# EAGLE board E-Book Reader (EAGLE 9.7.0)
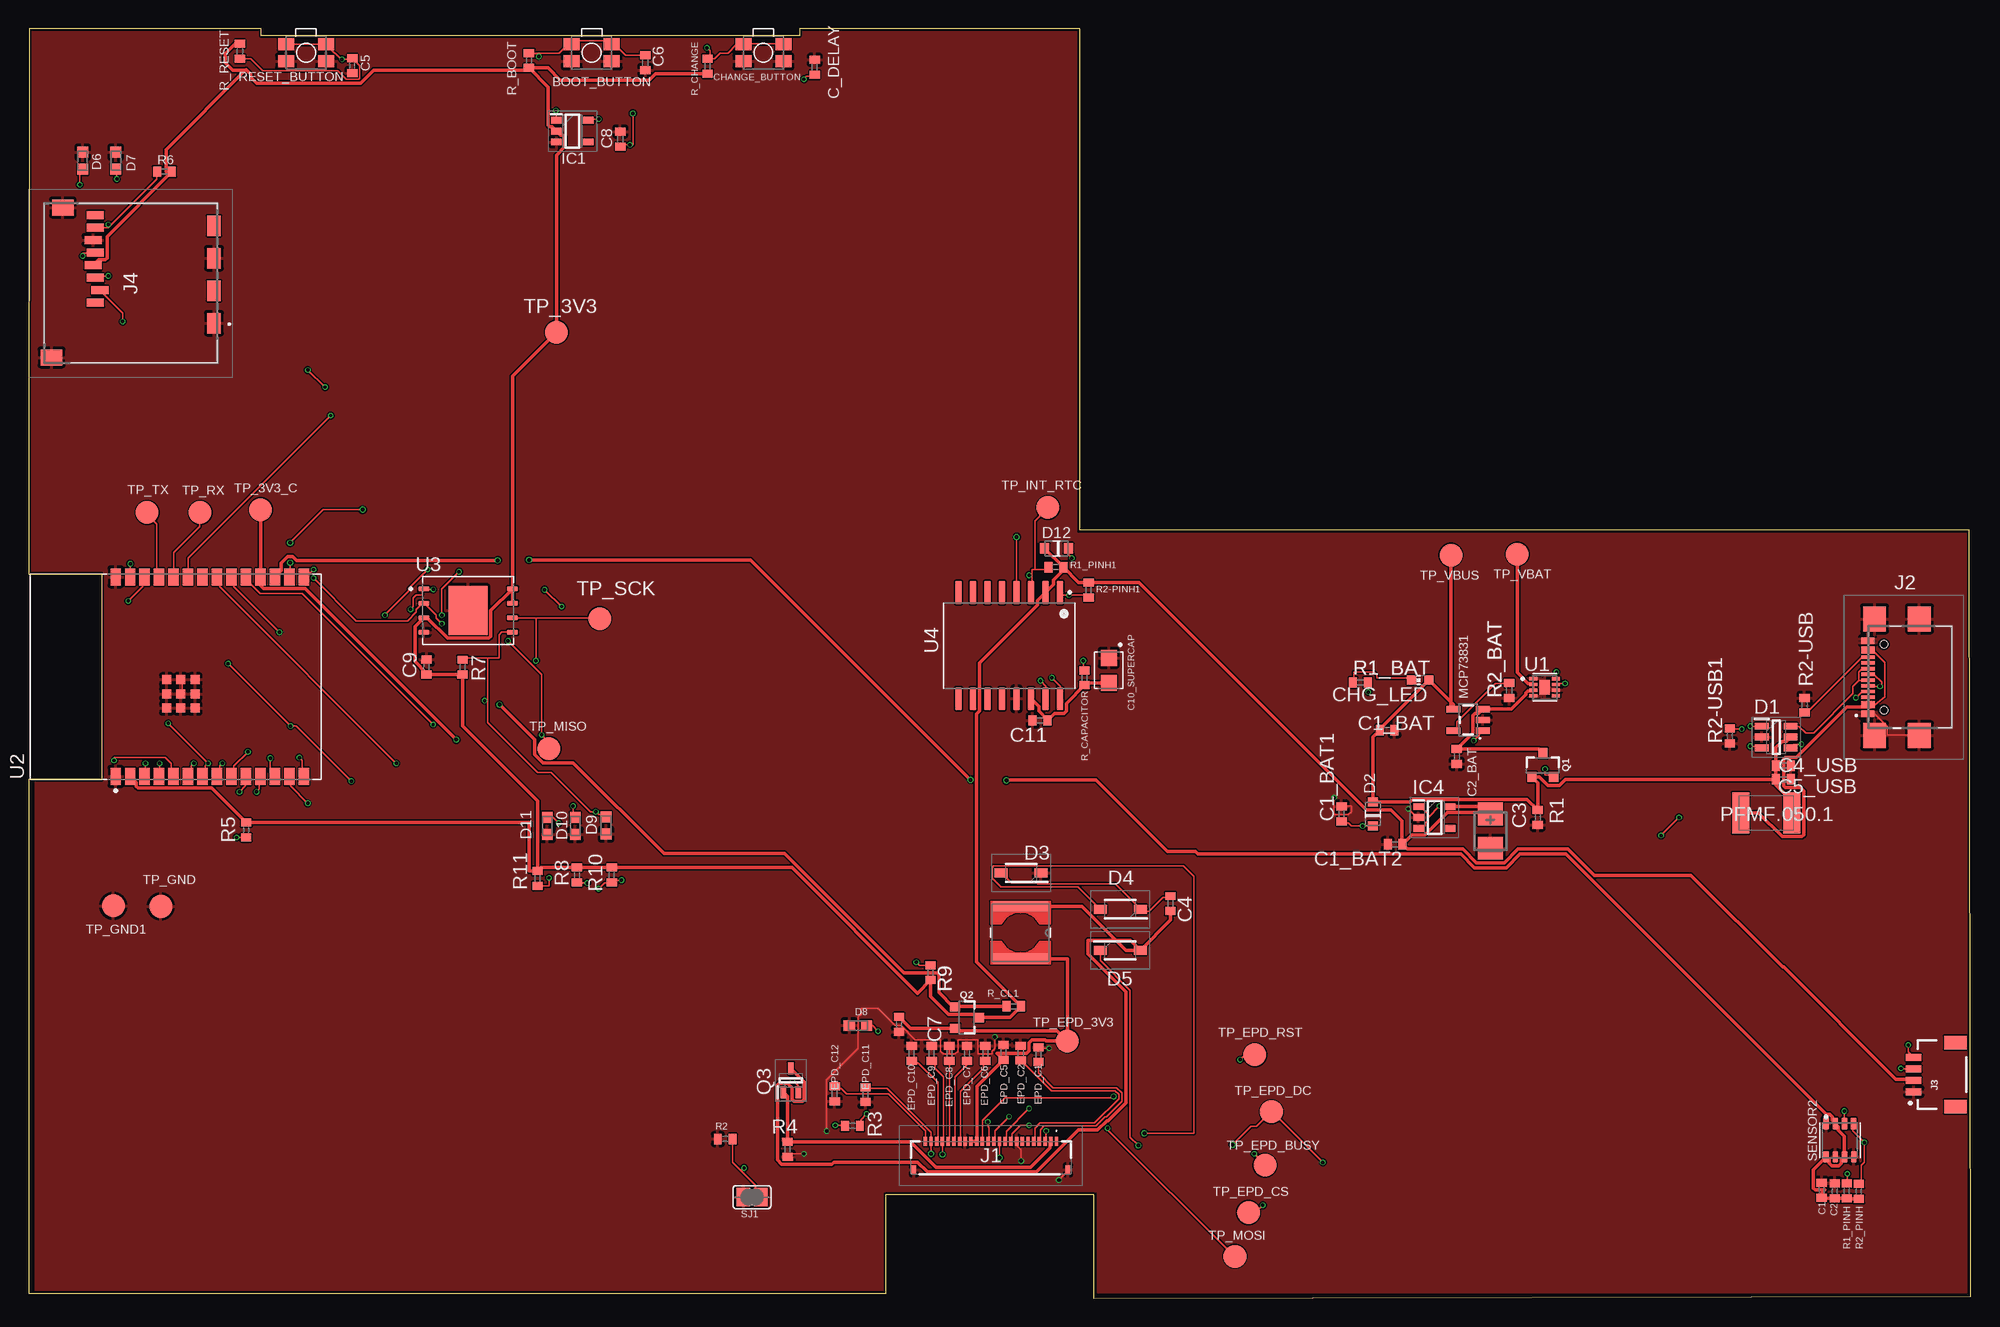
[diagram p0: board, top side]
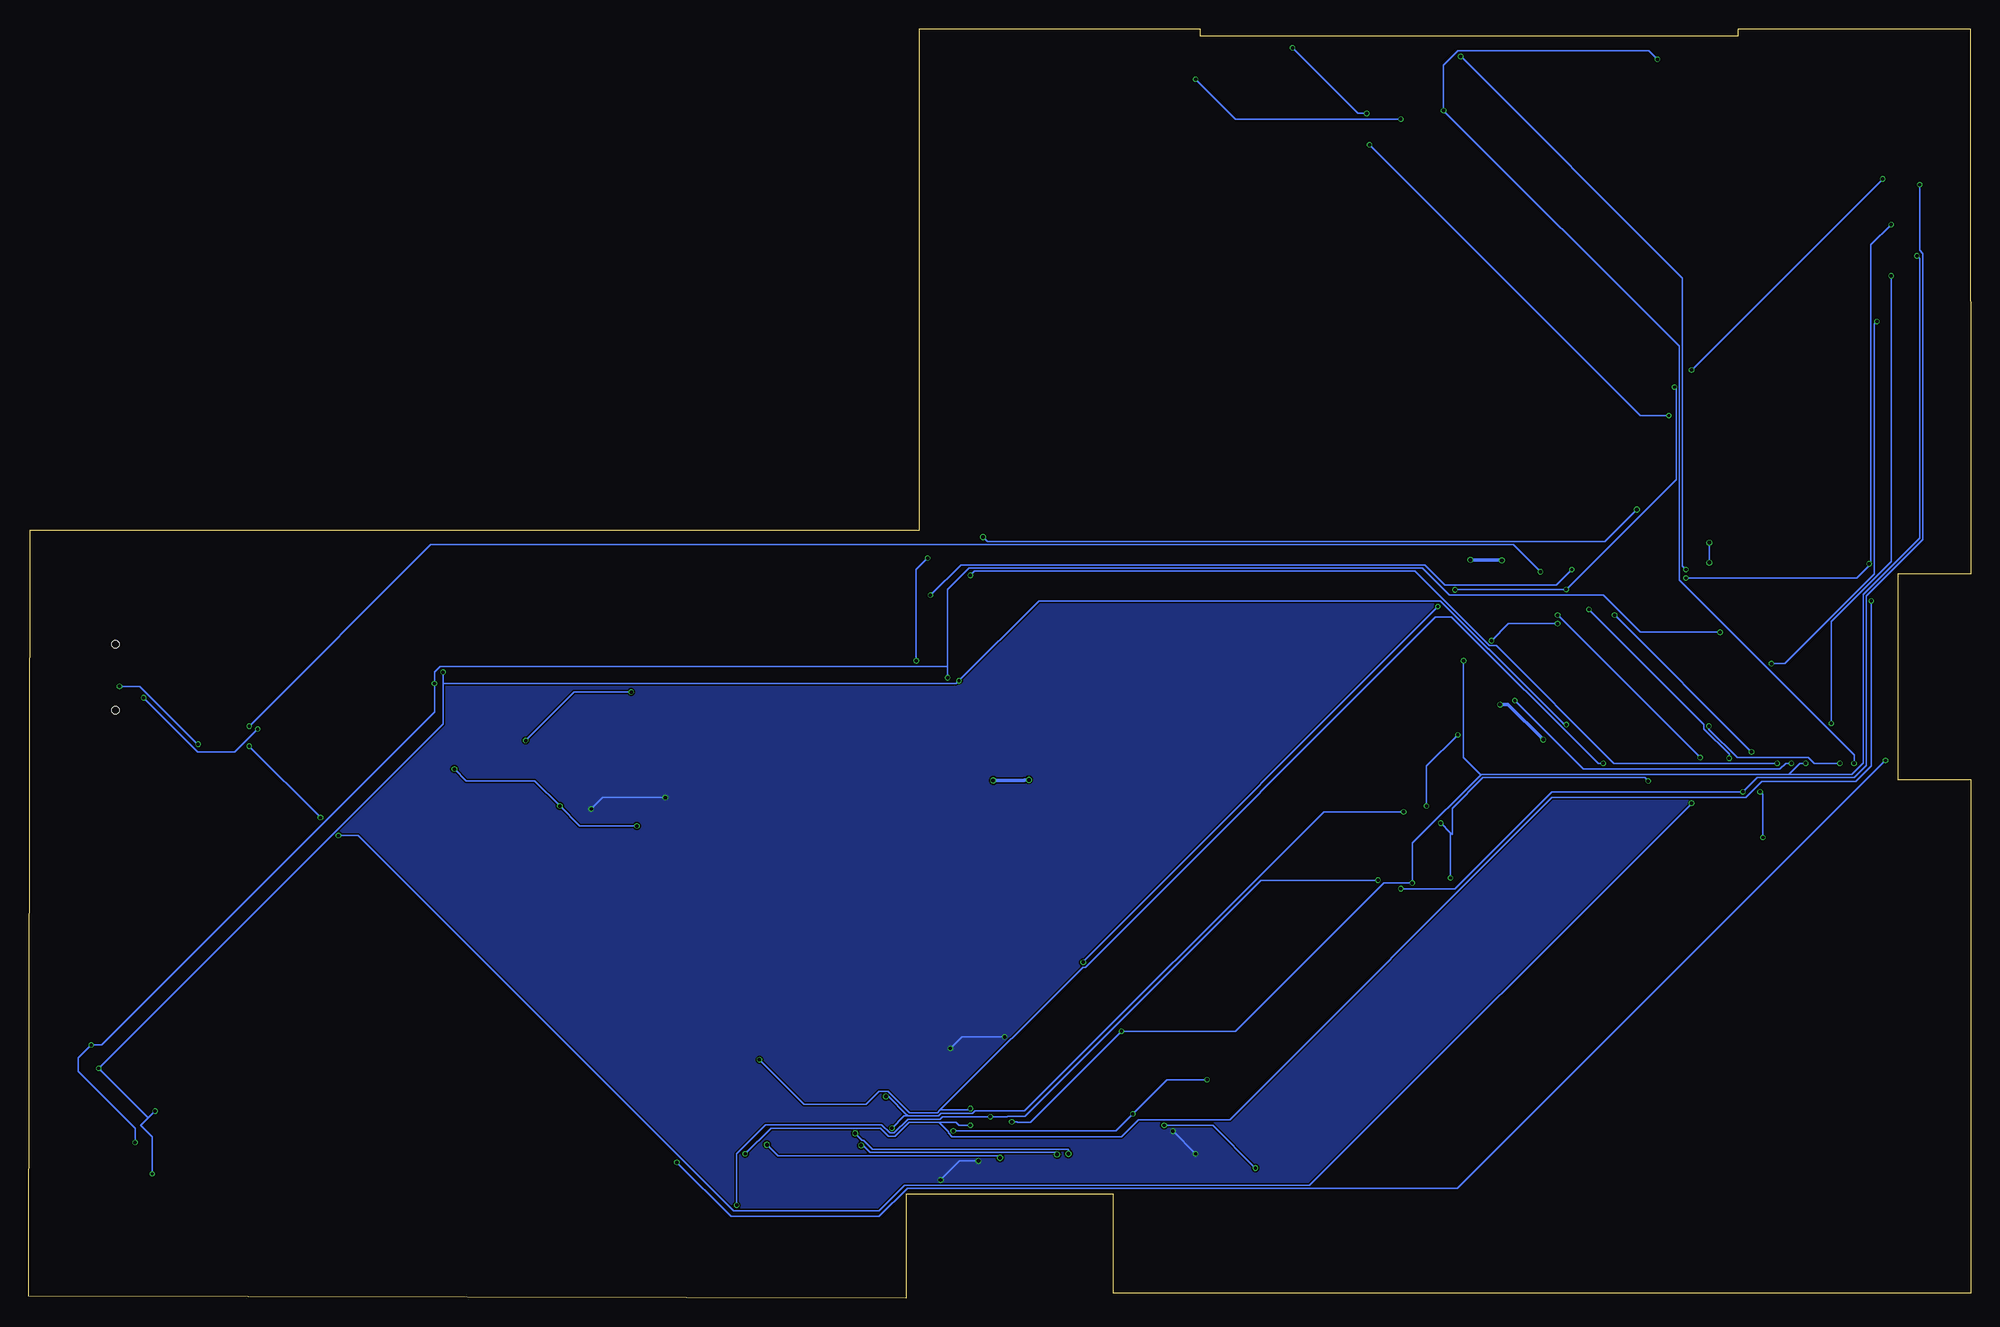
[diagram p1: board, bottom side, seen from below]

Size 170.35 x 111.35 mm. Coordinates in mm from the lower left corner, seen from the top.
Outline: 0,0.4 75.2,0.4 75.2,9.1 93.4,9.1 93.4,0 170.35,0.15 170.2,67.35 92.2,67.35 92.2,111.35 67.6,111.35 67.6,110.7 20.4,110.7 20.4,111.35 0.05,111.35 0.03,63.5 6.4,63.5 6.4,45.5 0.02,45.5 0,0.4
Copper layers (1*16): Top 0.035mm / dielectric 1.6mm / Bottom 0.035mm
Design rules "jlcpcb-2layers.dru *": minimum track width 6mil, minimum drill 0.3mm, track to track 5mil, track to pad 5mil, pad to pad 5mil, via to via 5mil, smd to smd 5mil, copper to edge 0.2mm, drill to drill 6mil, minimum pad ring 10mil, minimum via ring 3mil, stop-mask expansion 4mil, vias tented up to drill 0mil, thermal gap 10mil

## Footprints (pad centres in the part's own frame; a part is rotated, then mirrored left to right if it is on the bottom)
MYBUTTON = smd 1.4 x 1.05: 1 1.75,0.75; 2 -1.75,0.75; 3 -1.75,-0.75; 4 1.75,-0.75
ESP32_WROVER_EAGLE-LTSPICE_C0402 = smd 0.7 x 0.9: 1 -0.65,0; 2 0.65,0
RCL_CT3528 = smd 2 x 2.2: + -1.5,0; - 1.5,0
CAPCP3225X100N = smd 1.4 x 1.4: 1 -1.1,0; 2 1.1,0
ADAFRUIT_CHIP-LED0603 = smd 0.8 x 0.8: A 0,-0.75; C 0,0.75
SOT95P280X145-6N = smd 1.2 x 0.6: 1 -1.25,0.95; 2 -1.25,0; 3 -1.25,-0.95; 4 1.25,-0.95; 5 1.25,0; 6 1.25,0.95
ESP32_WROVER_AVX---SD0805S020S1R0_AVX_SD0805S020S1R0_0 = smd 0.8 x 0.9: 1 -1.05,0; 2 1.05,0
SOD3716X135N = smd 1.15 x 0.8: 1 -1.75,0; 2 1.75,0
DIOC1608X36N = smd 0.97 x 0.94: 1 -0.75,0; 2 0.75,0
SOT95P280X125-5N = smd 0.9 x 0.6: 1 -1.4,0.95; 2 -1.4,0; 3 -1.4,-0.95; 4 1.4,-0.95; 5 1.4,0.95
SOT95P280X120-5N = smd 0.9 x 0.6: 1 -1.4,0.95; 2 -1.4,0; 3 -1.4,-0.95; 4 1.4,-0.95; 5 1.4,0.95
FH34SRJ24S05SH99 = smd 0.3 x 0.8: 1 5.75,1.45; 2 5.25,1.45; 3 4.75,1.45; 4 4.25,1.45; 5 3.75,1.45; 6 3.25,1.45; 7 2.75,1.45; 8 2.25,1.45; 9 1.75,1.45; 10 1.25,1.45; 11 0.75,1.45; 12 0.25,1.45; 13 -0.25,1.45; 14 -0.75,1.45; 15 -1.25,1.45; 16 -1.75,1.45; 17 -2.25,1.45; 18 -2.75,1.45; 19 -3.25,1.45; 20 -3.75,1.45; 21 -4.25,1.45; 22 -4.75,1.45; 23 -5.25,1.45; 24 -5.75,1.45 | smd 0.4 x 0.8: MP1 6.75,-1.05; MP2 -6.75,-1.05
SAMACSYS_PARTS_USB4110GFA = smd 0.3 x 1.15: A1 -3.35,4.017; A4 -2.55,3.989; A5 -1.25,3.989; A6 -0.25,3.989; A7 0.25,3.989; A8 1.25,3.989; A9 2.55,3.989; A12 3.348,4.02; B1 3.048,4.02; B4 2.25,3.989; B5 1.75,3.989; B6 0.75,3.989; B7 -0.75,3.989; B8 -1.75,3.989; B9 -2.25,3.989; B12 -3.05,4.017 | smd 2.18 x 2: MP1 -5.11,-0.516; MP2 5.11,-0.516; MP3 -5.11,3.414; MP4 5.11,3.414 | hole 0.65: -2.89,2.603; 2.89,2.603
JST04_1MM_RA = smd 0.6 x 1.35: 1 -1.5,0; 2 -0.5,0; 3 0.5,0; 4 1.5,0 | smd 1.2 x 2: NC1 2.8,-3.675; NC2 -2.8,-3.675
112ATAARR03ATTEND = smd 1.8 x 1.2: G1 10.6,10.4; G2 4.9,10.4; S1 7.75,10.4; S2 2.05,10.4 | smd 1.4 x 1.9: G3 13.6,-3.85; G4 0.45,-2.85 | smd 0.7 x 1.5: P1 8.8,0; P2 7.7,0.4; P3 6.6,0; P4 5.5,-0.2; P5 4.4,0; P6 3.3,-0.2; P7 2.2,0; P8 1.1,0
IND_4828-WE-TPC_WRE = smd 0.889 x 4.826: 1 -2.286,0; 2 2.286,0
ESP32_WROVER_SPARKFUN-IC-POWER_SOT23-5 = smd 0.55 x 1.2: 1 -0.95,-1.3; 2 0,-1.3; 3 0.95,-1.3; 4 0.95,1.3; 5 -0.95,1.3
ESP32C6_VARISTOR_CT/CN1812 = smd 1.5 x 3.6: 1 -2.25,0; 2 2.25,0
ESP32_WROVER_SPARKFUN-DISCRETESEMI_SOT23-3 = smd 0.8 x 0.9: 1 -0.95,-1; 2 0.95,-1; 3 0,1.1
SOT65P210X110-3N = smd 1.05 x 0.5: 1 -1.05,0.65; 2 -1.05,-0.65; 3 1.05,0
ESP32_WROVER_EAGLE-LTSPICE_R0402 = smd 0.7 x 0.9: 1 -0.65,0; 2 0.65,0
ESP32_WROVER_BME680_PSON80P300X300X100-8N = smd 1.016 x 0.5: 1 1.458,1.2; 2 1.458,0.4; 3 1.458,-0.4; 4 1.458,-1.2; 5 -1.458,-1.22; 6 -1.458,-0.4; 7 -1.458,0.4; 8 -1.458,1.2
SJ = smd 1.168 x 1.6: 1 -0.762,0; 2 0.762,0
TP20R = smd 2 x 2: TP 0,0
SON50P200X200X80-9N = smd 0.76 x 0.27: 1 -0.985,0.75; 2 -0.985,0.25; 3 -0.985,-0.25; 4 -0.985,-0.75; 5 0.985,-0.75; 6 0.985,-0.25; 7 0.985,0.25; 8 0.985,0.75 | smd 0.9 x 1.3: 9 0,0
XCVR_ESP32-C6-WROOM-1-N8 = smd 1.5 x 0.9: 1 -8.75,5.26; 2 -8.75,3.99; 3 -8.75,2.72; 4 -8.75,1.45; 5 -8.75,0.18; 6 -8.75,-1.09; 7 -8.75,-2.36; 8 -8.75,-3.63; 9 -8.75,-4.9; 10 -8.75,-6.17; 11 -8.75,-7.44; 12 -8.75,-8.71; 13 -8.75,-9.98; 14 -8.75,-11.25; 15 8.75,-11.25; 16 8.75,-9.98; 17 8.75,-8.71; 18 8.75,-7.44; 19 8.75,-6.17; 20 8.75,-4.9; 21 8.75,-3.63; 22 8.75,-2.36; 23 8.75,-1.09; 24 8.75,0.18; 25 8.75,1.45; 26 8.75,2.72; 27 8.75,3.99; 28 8.75,5.26 | smd 0.8 x 0.8: 29_1 -2.755,0.79; 29_2 -1.505,0.79; 29_3 -0.255,0.79; 29_4 -2.755,-0.46; 29_5 -1.505,-0.46; 29_6 -0.255,-0.46; 29_7 -2.755,-1.71; 29_8 -1.505,-1.71; 29_9 -0.255,-1.71
SON127P600X800X80-9N = smd 0.94 x 0.44: 1 -3.895,1.905; 2 -3.895,0.635; 3 -3.895,-0.635; 4 -3.895,-1.905; 5 3.895,-1.905; 6 3.895,-0.635; 7 3.895,0.635; 8 3.895,1.905 | smd 3.4 x 4.3: 9 0,0
SOIC127P1032X265-16N = smd 2.05 x 0.59: 1 -4.655,4.445; 2 -4.655,3.175; 3 -4.655,1.905; 4 -4.655,0.635; 5 -4.655,-0.635; 6 -4.655,-1.905; 7 -4.655,-3.175; 8 -4.655,-4.445; 9 4.655,-4.445; 10 4.655,-3.175; 11 4.655,-1.905; 12 4.655,-0.635; 13 4.655,0.635; 14 4.655,1.905; 15 4.655,3.175; 16 4.655,4.445

## Placement (x,y rotation side)
BOOT_BUTTON  BUTTON_CUSYOMV1  [MYBUTTON]  49.39,109.23 180 top
C1  100nF  [ESP32_WROVER_EAGLE-LTSPICE_C0402]  157.25,9.45 90 top
C1_BAT  4.7uF  [ESP32_WROVER_EAGLE-LTSPICE_C0402]  119.15,49.8 0 top
C1_BAT1  4.7uF  [ESP32_WROVER_EAGLE-LTSPICE_C0402]  115.15,42.45 90 top
C1_BAT2  4.7uF  [ESP32_WROVER_EAGLE-LTSPICE_C0402]  119.85,39.8 180 top
C2  100nF  [ESP32_WROVER_EAGLE-LTSPICE_C0402]  158.4,9.4 90 top
C2_BAT  4.7uF  [ESP32_WROVER_EAGLE-LTSPICE_C0402]  125.25,47.5 270 top
C3  100uF TANT  [RCL_CT3528]  128.2,40.95 270 top
C4  4.7uF/25V  [ESP32_WROVER_EAGLE-LTSPICE_C0402]  100.15,34.6 270 top
C4_USB  100nF  [ESP32_WROVER_EAGLE-LTSPICE_C0402]  153.9,46.7 0 top
C5  1uF  [ESP32_WROVER_EAGLE-LTSPICE_C0402]  28.4,108.09 270 top
C5_USB  4.7uF  [ESP32_WROVER_EAGLE-LTSPICE_C0402]  153.9,45.5 0 top
C6  100nF  [ESP32_WROVER_EAGLE-LTSPICE_C0402]  54.1,108.35 270 top
C7  10uF  [ESP32_WROVER_EAGLE-LTSPICE_C0402]  76.35,24 270 top
C8  100nF  [ESP32_WROVER_EAGLE-LTSPICE_C0402]  51.9,101.65 90 top
C9  100nF  [ESP32_WROVER_EAGLE-LTSPICE_C0402]  34.9,55.35 89.1 top
C10_SUPERCAP  CPH3225A  [CAPCP3225X100N]  94.75,55.05 270 top
C11  100nF  [ESP32_WROVER_EAGLE-LTSPICE_C0402]  88.7,50.65 180 top
C_DELAY  100nF  [ESP32_WROVER_EAGLE-LTSPICE_C0402]  68.95,107.95 90 top
CHANGE_BUTTON  BUTTON_CUSYOMV1  [MYBUTTON]  64.45,109.23 180 top
CHG_LED  [ADAFRUIT_CHIP-LED0603]  122.05,54.2 90 top
D1  USBLC6-2SC6Y  [SOT95P280X145-6N]  153.26,49.2 0 top
D2  ESP32_WROVER_AVX---SD0805S020S1R0_AVX_SD0805S020S1R0_0_0AVX_SD0805S020S1R0_0_0  [ESP32_WROVER_AVX---SD0805S020S1R0_AVX_SD0805S020S1R0_0]  117.9,42.45 90 top
D3  MBR0530  [SOD3716X135N]  87.05,37.29 180 top
D4  MBR0530  [SOD3716X135N]  95.75,34.1 180 top
D5  MBR0530  [SOD3716X135N]  95.75,30.5 0 top
D6  PGB1010603MR  [DIOC1608X36N]  4.75,99.75 270 top
D7  PGB1010603MR  [DIOC1608X36N]  7.66,99.75 270 top
D8  PGB1010603MR  [DIOC1608X36N]  72.73,23.9 0 top
D9  PGB1010603MR  [DIOC1608X36N]  50.65,41.45 90 top
D10  PGB1010603MR  [DIOC1608X36N]  47.95,41.4 90 top
D11  PGB1010603MR  [DIOC1608X36N]  45.5,41.4 90 top
D12  ESP32_WROVER_AVX---SD0805S020S1R0_AVX_SD0805S020S1R0_0_0AVX_SD0805S020S1R0_0_0  [ESP32_WROVER_AVX---SD0805S020S1R0_AVX_SD0805S020S1R0_0]  90.15,65.75 180 top
EPD_C1  1uF/50V  [ESP32_WROVER_EAGLE-LTSPICE_C0402]  88.57,21.35 90 top
EPD_C2  1uF/50V  [ESP32_WROVER_EAGLE-LTSPICE_C0402]  87.01,21.49 90 top
EPD_C5  0.1uF/50V  [ESP32_WROVER_EAGLE-LTSPICE_C0402]  85.51,21.55 90 top
EPD_C6  1uF/50V  [ESP32_WROVER_EAGLE-LTSPICE_C0402]  83.91,21.45 90 top
EPD_C7  1uF/50V  [ESP32_WROVER_EAGLE-LTSPICE_C0402]  82.31,21.45 90 top
EPD_C8  1uF/50V  [ESP32_WROVER_EAGLE-LTSPICE_C0402]  80.75,21.45 90 top
EPD_C9  1uF/50V  [ESP32_WROVER_EAGLE-LTSPICE_C0402]  79.2,21.45 90 top
EPD_C10  1uF/50V  [ESP32_WROVER_EAGLE-LTSPICE_C0402]  77.45,21.45 90 top
EPD_C11  1uF/50V  [ESP32_WROVER_EAGLE-LTSPICE_C0402]  73.4,17.85 270 top
EPD_C12  1uF/50V  [ESP32_WROVER_EAGLE-LTSPICE_C0402]  70.7,17.9 270 top
IC1  BD5229G-TR  [SOT95P280X125-5N]  47.7,102.35 0 top
IC4  XC6220A331MR-G  [SOT95P280X120-5N]  123.3,42.15 0 top
J1  FH34SRJ-24S-0.5SH_99_  [FH34SRJ24S05SH99]  84.4,12.3 0 top
J2  SAMACSYS_PARTS_USB4110-GF-A  [SAMACSYS_PARTS_USB4110GFA]  165.31,54.45 90 top
J3  QWIIC_RIGHT_ANGLE  [JST04_1MM_RA]  165.32,19.6 90 top
J4  112A-TAAR-R03_ATTEND  [112ATAARR03ATTEND]  5.87,96.09 270 top
L1  744043680IND_4828-WE-TPC_WRE  [IND_4828-WE-TPC_WRE]  87,32.05 270 top
MCP73831  ESP32_WROVER_SPARKFUN-IC-POWER_MCP73831  [ESP32_WROVER_SPARKFUN-IC-POWER_SOT23-5]  126.25,50.7 90 top
PFMF.050.1  ESP32C6_VARISTORCN1812  [ESP32C6_VARISTOR_CT/CN1812]  152.4,42.55 0 top
Q1  20V/4.2A/52mΩ/1.4W  [ESP32_WROVER_SPARKFUN-DISCRETESEMI_SOT23-3]  132.8,46.7 0 top
Q2  20V/4.2A/52mΩ/1.4W  [ESP32_WROVER_SPARKFUN-DISCRETESEMI_SOT23-3]  82.25,24.6 270 top
Q3  SI1308EDL-T1-GE3  [SOT65P210X110-3N]  66.85,19.1 90 top
R1  100K  [ESP32_WROVER_EAGLE-LTSPICE_R0402]  132.35,42.15 90 top
R1_BAT  200  [ESP32_WROVER_EAGLE-LTSPICE_R0402]  116.8,54 0 top
R1_PINH  10K  [ESP32_WROVER_EAGLE-LTSPICE_R0402]  159.45,9.4 270 top
R1_PINH1  10K  [ESP32_WROVER_EAGLE-LTSPICE_R0402]  90.1,64.1 0 top
R2  2.2  [ESP32_WROVER_EAGLE-LTSPICE_R0402]  61.1,13.95 0 top
R2-PINH1  10K  [ESP32_WROVER_EAGLE-LTSPICE_R0402]  92.97,62.11 90 top
R2-USB  5k1  [ESP32_WROVER_EAGLE-LTSPICE_R0402]  155.75,52 90 top
R2-USB1  5k1  [ESP32_WROVER_EAGLE-LTSPICE_R0402]  149.2,49.3 90 top
R2_BAT  2K  [ESP32_WROVER_EAGLE-LTSPICE_R0402]  129.85,53.3 90 top
R2_PINH  10K  [ESP32_WROVER_EAGLE-LTSPICE_R0402]  160.5,9.35 270 top
R3  0.47  [ESP32_WROVER_EAGLE-LTSPICE_R0402]  72.25,15.1 0 top
R4  10K  [ESP32_WROVER_EAGLE-LTSPICE_R0402]  66.56,13.05 90.7 top
R5  10K  [ESP32_WROVER_EAGLE-LTSPICE_R0402]  19.1,41.05 90 top
R6  10K  [ESP32_WROVER_EAGLE-LTSPICE_R0402]  11.93,98.8 0 top
R7  10K  [ESP32_WROVER_EAGLE-LTSPICE_R0402]  38.07,55.33 269.6 top
R8  10K  [ESP32_WROVER_EAGLE-LTSPICE_R0402]  48.1,37.1 90 top
R9  10K  [ESP32_WROVER_EAGLE-LTSPICE_R0402]  79.1,28.54 270 top
R10  10K  [ESP32_WROVER_EAGLE-LTSPICE_R0402]  51.15,37.1 90 top
R11  10K  [ESP32_WROVER_EAGLE-LTSPICE_R0402]  44.65,36.8 90 top
R_BOOT  10K  [ESP32_WROVER_EAGLE-LTSPICE_R0402]  43.89,108.55 270 top
R_CAPACITOR  15  [ESP32_WROVER_EAGLE-LTSPICE_R0402]  92.6,54.4 270 top
R_CHANGE  10K  [ESP32_WROVER_EAGLE-LTSPICE_R0402]  59.54,108.05 270 top
R_CL1  10K  [ESP32_WROVER_EAGLE-LTSPICE_R0402]  86.4,25.6 0 top
R_RESET  10K  [ESP32_WROVER_EAGLE-LTSPICE_R0402]  18.54,109.35 90 top
RESET_BUTTON  BUTTON_CUSYOMV1  [MYBUTTON]  24.34,109.22 180 top
SENSOR2  ESP32_WROVER_BME680_BME680  [ESP32_WROVER_BME680_PSON80P300X300X100-8N]  158.85,13.85 90 top
SJ1  [SJ]  63.45,8.85 0 top
TP_3V3  TPTP20R  [TP20R]  46.3,84.7 0 top
TP_3V3_C  TPTP20R  [TP20R]  20.35,69.15 0 top
TP_EPD_3V3  TPTP20R  [TP20R]  91.1,22.55 0 top
TP_EPD_BUSY  TPTP20R  [TP20R]  108.45,11.65 0 top
TP_EPD_CS  TPTP20R  [TP20R]  107,7.5 0 top
TP_EPD_DC  TPTP20R  [TP20R]  109,16.35 0 top
TP_EPD_RST  TPTP20R  [TP20R]  107.55,21.35 0 top
TP_GND  TPTP20R  [TP20R]  11.6,34.35 0 top
TP_GND1  TPTP20R  [TP20R]  7.45,34.4 0 top
TP_INT_RTC  TPTP20R  [TP20R]  89.4,69.35 0 top
TP_MISO  TPTP20R  [TP20R]  45.65,48.2 0 top
TP_MOSI  TPTP20R  [TP20R]  105.8,3.65 0 top
TP_RX  TPTP20R  [TP20R]  15.05,68.9 0 top
TP_SCK  TPTP20R  [TP20R]  50.1,59.6 0 top
TP_TX  TPTP20R  [TP20R]  10.4,68.9 0 top
TP_VBAT  TPTP20R  [TP20R]  130.55,65.25 0 top
TP_VBUS  TPTP20R  [TP20R]  124.75,65.15 0 top
U1  MAX17048G+T10  [SON50P200X200X80-9N]  132.96,53.57 0 top
U2  ESP32-C6-WROOM-1-N8  [XCVR_ESP32-C6-WROOM-1-N8]  12.9,54.5 90 top
U3  W25Q512JVEIQ  [SON127P600X800X80-9N]  38.55,60.3 0 top
U4  DS3231SN#  [SOIC127P1032X265-16N]  86,57.22 270 top

## Library data of the parts
BOOT_BUTTON CHANGE_BUTTON CHG_LED PFMF.050.1 RESET_BUTTON SJ1 TP_3V3 TP_3V3_C TP_EPD_3V3 TP_EPD_BUSY TP_EPD_CS TP_EPD_DC TP_EPD_RST TP_GND TP_GND1 TP_INT_RTC TP_MISO TP_MOSI TP_RX TP_SCK TP_TX TP_VBAT TP_VBUS = DeskAssistant v19 v1
C1 C1_BAT C1_BAT1 C1_BAT2 C2 C2_BAT C4 C4_USB C5 C5_USB C6-C9 C11 C_DELAY EPD_C1 EPD_C2 EPD_C5-EPD_C12 = DeskAssistant v19 v1; SPICEMODEL: NONE; SPICEPREFIX: C
C3 = DeskAssistant v19 v1; SPICEPREFIX: C
C10_SUPERCAP = DeskAssistant v19 v1; AVAILABILITY: Not in stock; CHECK_PRICES: https://www.snapeda.com/parts/CPH3225A/Seiko+Instruments/view-part/?ref=eda; DESCRIPTION: 11 mF (EDLC) Supercapacitor 3.3 V 1210 (3225 Metric) - -; MF: Seiko Instruments; MP: CPH3225A; PACKAGE: 1210 Seiko; PRICE: None; PURCHASE-URL: https://www.snapeda.com/api/url_track_click_mouser/?unipart_id=562593&manufacturer=Seiko Instruments&part_name=CPH3225A&search_term=None; SNAPEDA_LINK: https://www.snapeda.com/parts/CPH3225A/Seiko+Instruments/view-part/?ref=snap
D1 = DeskAssistant v19 v1; AVAILABILITY: In Stock; CHECK_PRICES: https://www.snapeda.com/parts/USBLC6-2SC6Y/STMicroelectronics/view-part/?ref=eda; DESCRIPTION: 17V Clamp 5A (8/20µs) Ipp Tvs Diode Surface Mount SOT-23-6; MF: STMicroelectronics; MP: USBLC6-2SC6Y; PACKAGE: SOT-23-6 STMicroelectronics; PRICE: None; SNAPEDA_LINK: https://www.snapeda.com/parts/USBLC6-2SC6Y/STMicroelectronics/view-part/?ref=snap
D2 D12 = DeskAssistant v19 v1; CENTROID_NOT_SPECIFIED: No; DATASHEET: http://datasheets.avx.com/schottky.pdf; DIGIKEY_DESCRIPTION: DIODE SCHOTTKY 20V 1A 0805; DIGIKEY_PART_NUMBER: 478-7800-1-ND; LEAD_FREE: yes; MF: AVX; MOUSER_PART_NUMBER: 581-SD0805S020S1R0; PACKAGE: 0805 (2012 metric); PREFIX: D; ROHS: yes; TEMPERATURE_RANGE_HIGH: +125°C; TEMPERATURE_RANGE_LOW: -55°C
D3-D5 = DeskAssistant v19 v1; AVAILABILITY: In Stock; CHECK_PRICES: https://www.snapeda.com/parts/MBR0530/Onsemi/view-part/?ref=eda; DESCRIPTION: Diode Schottky 30 V 500mA Surface Mount SOD-123; MF: ON Semiconductor; MP: MBR0530; PACKAGE: SOD-123-2 ON Semiconductor; PRICE: None; PURCHASE-URL: https://www.snapeda.com/api/url_track_click_mouser/?unipart_id=179458&manufacturer=ON Semiconductor&part_name=MBR0530&search_term=None; SNAPEDA_LINK: https://www.snapeda.com/parts/MBR0530/Onsemi/view-part/?ref=snap
D6-D11 = DeskAssistant v19 v1; AVAILABILITY: In Stock; CHECK_PRICES: https://www.snapeda.com/parts/PGB1010603MR/Littelfuse/view-part/?ref=eda; DESCRIPTION: 150V (Typ) Clamp - Ipp Tvs Diode Surface Mount 0603 (1608 Metric); MF: Littelfuse Inc.; MP: PGB1010603MR; PACKAGE: 0603 Littelfuse Inc.; PRICE: None; PURCHASE-URL: https://www.snapeda.com/api/url_track_click_mouser/?unipart_id=5659453&manufacturer=Littelfuse Inc.&part_name=PGB1010603MR&search_term=None; SNAPEDA_LINK: https://www.snapeda.com/parts/PGB1010603MR/Littelfuse/view-part/?ref=snap
IC1 = DeskAssistant v19 v1; DESCRIPTION: Voltage Detector with Adjustable Delay Time: CMOS processes are utilized to develop high precision, low current consumption CMOS reset ICs that allow arbitrary setting of the delay time. The extensive lineup includes both Nch Open Drain and CMOS output types in a wide range of detection voltages (from 2.3V to 6.0V, in 0.1V steps), enabling selection of the ideal solution based on customer requirements. In addition, the entire series is of course both lead-free and RoHS-compliant.; HEIGHT: 1.25mm; MANUFACTURER_NAME: ROHM Semiconductor; MANUFACTURER_PART_NUMBER: BD5229G-TR; MOUSER_PART_NUMBER: 755-BD5229G-TR; MOUSER_PRICE-STOCK: https://www.mouser.co.uk/ProductDetail/ROHM-Semiconductor/BD5229G-TR?qs=4kLU8WoGk0vvnhrrYwdszw%3D%3D
IC4 = DeskAssistant v19 v1; DESCRIPTION: LDO Voltage Regulators; HEIGHT: 1.2mm; MANUFACTURER_NAME: Torex; MANUFACTURER_PART_NUMBER: XC6220A331MR-G; MOUSER_PART_NUMBER: 865-XC6220A331MR-G; MOUSER_PRICE-STOCK: https://www.mouser.co.uk/ProductDetail/Torex-Semiconductor/XC6220A331MR-G?qs=AsjdqWjXhJ8ZSWznL1J0gg%3D%3D
J1 = DeskAssistant v19 v1; DESCRIPTION: 24 Position FFC, FPC Connector Contacts, Top and Bottom 0.020" (0.50mm) Surface Mount, Right Angle; HEIGHT: 1.1mm; MANUFACTURER_NAME: Hirose; MANUFACTURER_PART_NUMBER: FH34SRJ-24S-0.5SH(99); MOUSER_PART_NUMBER: 798-FH34SRJ24S05SH99; MOUSER_PRICE-STOCK: https://www.mouser.co.uk/ProductDetail/Hirose-Connector/FH34SRJ-24S-0.5SH99?qs=vcbW%252B4%252BSTIpKBl5ap9J8Fw%3D%3D
J2 = DeskAssistant v19 v1; DESCRIPTION: CONN USB 2.0 TYPE-C R/A SMT; HEIGHT: 3.26mm; MANUFACTURER_NAME: GCT (GLOBAL CONNECTOR TECHNOLOGY); MANUFACTURER_PART_NUMBER: USB4110-GF-A; MOUSER_PART_NUMBER: 640-USB4110-GF-A; MOUSER_PRICE-STOCK: https://www.mouser.co.uk/ProductDetail/GCT/USB4110-GF-A?qs=KUoIvG%2F9IlYiZvIXQjyJeA%3D%3D
J3 = DeskAssistant v19 v1; PROD_ID: CONN-13694
J4 = DeskAssistant v19 v1; DESCRIPTION: Micro SD Card Socket, Push-Push Type, Top Mount, SMT, H=1.83mm, 10u; HEIGHT: 1.9mm; MANUFACTURER_NAME: ATTEND; MANUFACTURER_PART_NUMBER: 112A-TAAR-R03 ATTEND
L1 = DeskAssistant v19 v1; COPYRIGHT: Copyright (C) 2024 Ultra Librarian. All rights reserved.; MANUFACTURER_PART_NUMBER: 744043680; MFR_NAME: Wurth Electronics
MCP73831 = DeskAssistant v19 v1; PROD_ID: IC-09995
Q1 Q2 = DeskAssistant v19 v1; PROD_ID: TRAN-14388
Q3 = DeskAssistant v19 v1; AVAILABILITY: In Stock; CHECK_PRICES: https://www.snapeda.com/parts/SI1308EDL-T1-GE3/Vishay+Siliconix/view-part/?ref=eda; DESCRIPTION: Si1308EDL-T1-GE3 N-channel MOSFET Transistor, 1.5 A, 30 V, 3-Pin SC-70 | Siliconix / Vishay SI1308EDL-T1-GE3; MF: Vishay Siliconix; MP: SI1308EDL-T1-GE3; PACKAGE: SOT-323 Vishay Semiconductor; PRICE: None; PURCHASE-URL: https://www.snapeda.com/api/url_track_click_mouser/?unipart_id=274603&manufacturer=Vishay Siliconix&part_name=SI1308EDL-T1-GE3&search_term=None; SNAPEDA_LINK: https://www.snapeda.com/parts/SI1308EDL-T1-GE3/Vishay+Siliconix/view-part/?ref=snap
R1 R1_BAT R1_PINH R1_PINH1 R2 R2-PINH1 R2-USB R2-USB1 R2_BAT R2_PINH R3-R11 R_BOOT R_CAPACITOR R_CHANGE R_CL1 R_RESET = DeskAssistant v19 v1; SPICEMODEL: NONE; SPICEPREFIX: R
SENSOR2 = DeskAssistant v19 v1; AVAILABILITY: Unavailable; DESCRIPTION: Integrated Environmental Unit; MF: Bosch Sensortec; MP: BME680; PACKAGE: LGA-8 Bosch Tools; PRICE: None
U1 = DeskAssistant v19 v1; AVAILABILITY: In Stock; CHECK_PRICES: https://www.snapeda.com/parts/MAX17048G+T10/Analog+Devices/view-part/?ref=eda; DESCRIPTION: 3µA 1-Cell/2-Cell Fuel Gauge with ModelGauge; MF: Analog Devices; MP: MAX17048G+T10; PACKAGE: TDFN-8 Maxim; PRICE: None; PURCHASE-URL: https://www.snapeda.com/api/url_track_click_mouser/?unipart_id=329239&manufacturer=Analog Devices&part_name=MAX17048G+T10&search_term=None; SNAPEDA_LINK: https://www.snapeda.com/parts/MAX17048G+T10/Analog+Devices/view-part/?ref=snap
U2 = DeskAssistant v19 v1; AVAILABILITY: In Stock; CHECK_PRICES: https://www.snapeda.com/parts/ESP32-C6-WROOM-1-N8/Espressif+Systems/view-part/?ref=eda; DESCRIPTION: Multiprotocol Modules ESP32-C6 module, Wi-Fi 6 in 2.4 GHz band, Bluetooth 5, Zigbee 3.0 and Thread. ESP34-WROOM Compatible - ENGINEERING SAMPLE; MF: Espressif Systems; MP: ESP32-C6-WROOM-1-N8; PACKAGE: None; PRICE: None; SNAPEDA_LINK: https://www.snapeda.com/parts/ESP32-C6-WROOM-1-N8/Espressif+Systems/view-part/?ref=snap
U3 = DeskAssistant v19 v1; AVAILABILITY: In Stock; CHECK_PRICES: https://www.snapeda.com/parts/W25Q512JVEIQ/Winbond+Electronics/view-part/?ref=eda; DESCRIPTION: FLASH - NOR Memory IC 512Mb (64M x 8) SPI - Quad I/O 133 MHz 8-WSON (8x6); MF: Winbond Electronics; MP: W25Q512JVEIQ; PACKAGE: Package; PRICE: None; SNAPEDA_LINK: https://www.snapeda.com/parts/W25Q512JVEIQ/Winbond+Electronics/view-part/?ref=snap
U4 = DeskAssistant v19 v1; AVAILABILITY: In Stock; CHECK_PRICES: https://www.snapeda.com/parts/DS3231SN%23/Analog+Devices/view-part/?ref=eda; DESCRIPTION: Extremely Accurate I²C-Integrated RTC/TCXO/Crystal; MF: Analog Devices; MP: DS3231SN#; PACKAGE: SOIC-16 Maxim; PRICE: None; PURCHASE-URL: https://www.snapeda.com/api/url_track_click_mouser/?unipart_id=99048&manufacturer=Analog Devices&part_name=DS3231SN#&search_term=None; SNAPEDA_LINK: https://www.snapeda.com/parts/DS3231SN%23/Analog+Devices/view-part/?ref=snap

## Nets
3V3 [Power]: C1_BAT2.1 C3.+ C9.1 D12.2 IC1.2 IC4.5 J3.2 J4.P4 Q2.3 R1_PINH1.2 R2-PINH1.2 R5.2 R6.2 R7.2 R8.2 R9.2 R10.2 R11.2 R_BOOT.2 R_CHANGE.2 R_CL1.2 R_RESET.2 TP_3V3.TP U2.2 U3.3 U3.7 U3.8 U4.2
32KHZ [Signal]: R2-PINH1.1 U2.9 U4.1
DN [Signal]: D1.4 J2.A7 J2.B7
DP [Signal]: D1.6 J2.A6 J2.B6
EPD_3V3 [Power]: C7.1 EPD_C5.1 J1.15 J1.16 L1.2 Q2.2 TP_EPD_3V3.TP
EPD_3V3_C [Power]: Q2.1 R_CL1.1 TP_3V3_C.TP U2.18
EPD_BUSY [Signal]: J1.9 TP_EPD_BUSY.TP U2.26
EPD_CS [Signal]: D6.2 J1.12 R10.1 TP_EPD_CS.TP U2.11
EPD_DC [Signal]: J1.11 TP_EPD_DC.TP U2.5
EPD_RST [Signal]: J1.10 TP_EPD_RST.TP U2.21
FLASH_CS [Signal]: D7.2 R9.1 U2.12 U3.1
GDR [Power]: J1.2 Q3.1 R4.2
GND [Power]: BOOT_BUTTON.1 BOOT_BUTTON.2 C1.2 C1_BAT1.2 C1_BAT2.2 C1_BAT.2 C2.2 C2_BAT.2 C3.- C4_USB.2 C5.2 C5_USB.2 C6.2 C7.2 C8.2 C9.2 C10_SUPERCAP.1 C11.2 C_DELAY.2 CHANGE_BUTTON.1 CHANGE_BUTTON.2 D1.2 D3.1 D6.1 D7.1 D8.1 D9.1 D10.1 D11.1 EPD_C1.2 EPD_C2.2 EPD_C5.2 EPD_C6.2 EPD_C7.2 EPD_C8.2 EPD_C9.2 EPD_C10.2 EPD_C11.2 EPD_C12.2 IC1.3 IC4.2 J1.8 J1.17 J1.MP1 J1.MP2 J2.A1 J2.A12 J2.B1 J2.B12 J2.MP1 J2.MP2 J2.MP3 J2.MP4 J3.1 J4.G1 J4.G2 J4.G3 J4.G4 J4.P6 MCP73831.2 R1.1 R2-USB1.1 R2-USB.2 R2.1 R2_BAT.1 R4.1 RESET_BUTTON.1 RESET_BUTTON.2 SENSOR2.1 SENSOR2.5 SENSOR2.7 SJ1.1 TP_GND1.TP TP_GND.TP U1.1 U1.4 U1.6 U1.9 U2.1 U2.28 U2.29_1 U2.29_2 U2.29_3 U2.29_4 U2.29_5 U2.29_6 U2.29_7 U2.29_8 U2.29_9 U3.4 U3.9 U4.13
GPIO8 [Signal]: R5.1 U2.10
I2C_PW [Power]: C1.1 C2.1 R1_PINH.2 R2_PINH.2 SENSOR2.2 SENSOR2.6 SENSOR2.8 U2.17
INT_RTC [Signal]: R1_PINH1.1 TP_INT_RTC.TP U2.8 U4.3
IO/BOOT [Signal]: BOOT_BUTTON.3 BOOT_BUTTON.4 C6.1 R_BOOT.1 U2.15
IO/CHANGE [Signal]: C8.1 CHANGE_BUTTON.3 CHANGE_BUTTON.4 R_CHANGE.1 U2.23
MISO [Signal]: D10.2 J4.P7 R6.1 TP_MISO.TP U2.27 U3.2
MOSI [Signal]: D9.2 J1.14 J4.P3 R7.1 TP_MOSI.TP U2.7 U3.5
P_NET_1 [Power]: J2.A5 R2-USB1.2
P_NET_2 [Power]: C1_BAT1.1 D2.1 IC4.1 IC4.3 Q1.2
P_NET_3 [Power]: EPD_C12.1 J1.24
P_NET_5 [Power]: EPD_C10.1 J1.22
P_NET_7 [Power]: EPD_C8.1 J1.20
P_NET_8 [Power]: EPD_C7.1 J1.19
P_NET_9 [Power]: EPD_C6.1 J1.18
P_NET_10 [Power]: EPD_C2.1 J1.5
P_NET_11 [Power]: EPD_C1.1 J1.4
P_NET_12 [Power]: C_DELAY.1 IC1.5
P_NET_13 [Power]: D12.1 R_CAPACITOR.1
P_NET_14 [Power]: MCP73831.5 R2_BAT.2
P_NET_15 [Power]: MCP73831.1 R1_BAT.2
P_NET_16 [Power]: CHG_LED.C R1_BAT.1
P_NET_17 [Power]: C4.1 D3.2 D4.1
P_NET_18 [Power]: J2.B5 R2-USB.1
PREVGH: D5.1 EPD_C9.1 J1.21
PREVGL: D4.2 EPD_C11.1 J1.23
RESE [Signal]: J1.3 Q3.2 R3.2
RESE' [Signal]: R2.2 R3.1 SJ1.2
RESET [Signal]: C5.1 IC1.1 R_RESET.1 RESET_BUTTON.3 RESET_BUTTON.4 U2.3
RTC_RST [Signal]: U2.16 U4.4
RX [Signal]: TP_RX.TP U2.24
SCK [Signal]: D8.2 J1.13 J4.P5 R8.1 TP_SCK.TP U2.6 U3.6
SCL [Signal]: J3.4 R2_PINH.1 SENSOR2.4 U1.7 U2.20 U4.16
SDA [Signal]: J3.3 R1_PINH.1 SENSOR2.3 U1.8 U2.19 U4.15
SRC [Power]: C4.2 D5.2 L1.1 Q3.3
SS_SD [Signal]: D11.2 J4.P2 R11.1 U2.4
TX [Signal]: TP_TX.TP U2.25
USB_D+ [Signal]: D1.1 U2.14
USB_D- [Signal]: D1.3 U2.13
VBAT [Power]: C2_BAT.1 MCP73831.3 Q1.3 TP_VBAT.TP U1.2 U1.3
VBUS [Power]: C1_BAT.1 C4_USB.1 C5_USB.1 CHG_LED.A D1.5 D2.2 MCP73831.4 PFMF.050.1.2 Q1.1 R1.2 TP_VBUS.TP
VRTC [Power]: C10_SUPERCAP.2 C11.1 R_CAPACITOR.2 U4.14
VUSB [Power]: J2.A4 J2.A9 J2.B4 J2.B9 PFMF.050.1.1

## Tracks (layer width: path | path; a pad name or v marks a point on that pad's centre or on a via)
3V3
  Top 0.3: R_BOOT.2 45.57,106.22 45.57,102.89 45.73,102.72 45.93,102.72 IC1.2 46.67,101.98 46.87,101.98 47.03,101.82 47.03,100.98 46.3,100.26 TP_3V3.TP 42.45,80.84 U3.8 | R_BOOT.2 45.56,107.9 46.64,106.82 54.41,106.82 54.99,107.4 R_CHANGE.2 | U3.7 U3.8 | U3.8 40.53,60.29 40.53,58.03 40.37,57.87 36.73,57.87 34.94,59.66 U3.3 33.91,58.92 33.91,55.81 34.89,54.83 C9.1 34.91,54.68 R7.2 38.06,50.19 44.65,43.6 R11.2 | R11.2 44.95,37.75 R8.2 R10.2 66.94,37.75 77.95,26.74 R9.2 79.1,26.46 80.69,24.87 83.08,24.87 Q2.3 86.05,24.6 R_CL1.2 83.15,29.5 83.15,51.22 83.4,51.47 83.4,55.7 88.48,60.78 88.48,61.18 U4.2 89.87,62.57 89.87,62.97 90.75,63.85 R1_PINH1.2 | R1_PINH1.2 D12.2 | R1_PINH1.2 92.1,62.76 R2-PINH1.2 97.4,62.76 117.33,42.82 119.47,42.82 120.43,41.87 120.43,39.87 C1_BAT2.1 | IC4.5 127.55,43.1 C3.+ 128.05,42.6 124.44,42.6 122.47,40.62 121.32,40.62 C1_BAT2.1 | R11.2 43.9,37.45 43.9,41.7 R5.2 16.08,44.72 9.62,44.72 9.45,44.88 9.45,45.21 U2.2 | 19.01,107.67 19.07,107.73 19.46,107.34 19.46,107.09 20.01,106.54 29.14,106.54 30.27,107.67 43.66,107.67 R_BOOT.2 | 19.01,107.67 12.07,100.73 12.07,98.8 R6.2 6.89,93.11 6.89,91.23 6.73,91.06 6.14,91.06 J4.P4 | C1_BAT2.1 120.92,39.38 125.78,39.38 126.98,38.17 129.41,38.17 130.62,39.38 134.99,39.38 137.31,37.05 145.8,37.05 153.83,29.02 153.93,29.02 163.75,19.2 165.22,19.2 J3.2 | R_RESET.2 18.14,110 17.26,109.12 17.26,108.34 17.93,107.67 19.01,107.67
32KHZ  (via drill 0.3)
  Top 0.152: R2-PINH1.1 92.75,61.65 v91.25,61.65 90.5,61.65 U4.1 | v31.25,59.9 33.35,62 33.35,62.25 v35,63.9 | U2.9 18,45.9 18,46.65 19.24,47.89 v19.24,47.91
  Bottom 0.152: v35,63.9 36.35,62.55 46.15,62.55 47.91,64.31 88.59,64.31 v91.25,61.65 | v31.25,59.9 19.26,47.91 v19.24,47.91
DN  (via drill 0.3)
  Top 0.152: J2.A7 161.75,54.65 161.88,54.65 162.52,54.01 162.52,53.65 | D1.4 154.81,48.55 155.46,48.55 v155.48,48.57 | 162.52,53.65 v162.37,53.65 | 162.52,53.65 161.37,53.65 J2.B7
  Bottom 0.152: v155.48,48.57 155.52,48.57 160.6,53.65 v162.37,53.65
DP
  Top 0.152: 160.5,54.15 161.5,54.15 J2.A6 | 160.5,54.15 160.5,54.9 160.75,55.15 161.5,55.15 J2.B6 | 160.5,54.15 160,53.65 160,53 156.54,49.55 155.85,49.55 155.25,50.15 154.75,50.15 D1.6
EPD_3V3
  Top 0.3: J1.16 J1.15 83.2,13.8 83.2,18.58 EPD_C5.1 84.95,21.46 87.53,21.46 87.74,21.67 87.74,22.37 88,22.63 89.13,22.63 89.21,22.55 TP_EPD_3V3.TP | TP_EPD_3V3.TP 91.1,29.76 L1.2 | TP_EPD_3V3.TP 90.2,23.45 81.45,23.45 Q2.2 77.35,23.65 C7.1
EPD_3V3_C  (via drill 0.35)
  Top 0.3: TP_3V3_C.TP U2.18 20.33,62.53 20.64,62.22 24.27,62.22 v37.52,48.97 | R_CL1.1 81.3,25.6 Q2.1 81.08,25.55 79.83,26.8 79.83,28.35 79.67,28.51 76.78,28.51 66.32,38.98 55.72,38.98 47.77,46.92 45.12,46.92 44.37,47.67 44.37,48.98 v41.3,52.05
  Bottom 0.3: v41.3,52.05 40.6,52.05 v37.52,48.97
EPD_BUSY  (via drill 0.3)
  Top 0.152: v87.75,15.15 87,15.15 86.25,14.4 86.25,13.9 J1.9 | v107.5,12.65 108.25,11.9 108.25,11.65 TP_EPD_BUSY.TP | U2.26 10,63.15 10,62.41 v8.74,61.15
  Bottom 0.152: v87.75,15.15 88.75,15.15 89,15.4 90.5,15.4 | 90.5,15.4 93.13,15.4 94.34,14.19 94.93,14.19 95.64,14.9 105.25,14.9 v107.5,12.65 | 90.5,15.4 89.68,14.58 89.68,14.48 89.34,14.15 74.5,14.15 73,15.65 65,15.65 36.75,43.9 19.75,43.9 18.35,45.3 10.1,45.3 8.75,46.65 v8.75,61.14 v8.74,61.15
EPD_CS  (via drill 0.3)
  Top 0.152: v4.5,97.65 4.5,98.65 4.75,98.9 D6.2 | v20,44.4 20.25,44.65 20.25,45.65 U2.11 | v86,15.9 84.75,14.65 84.75,13.9 J1.12 | v108.25,8.15 107.75,7.65 107,7.65 TP_EPD_CS.TP | v52,36.65 51.25,36.65 R10.1 51,36.4 50.5,36.4 v50,35.9
  Bottom 0.152: v4.5,97.65 4.5,91.9 4.22,91.62 4.22,66.53 9.17,61.58 9.17,46.73 10.25,45.65 18.75,45.65 v20,44.4 36.75,44.4 45.25,35.9 v50,35.9 | v108.25,8.15 108.25,12.65 105.72,15.18 95.53,15.18 94.81,14.47 94.46,14.47 93.24,15.69 90.42,15.69 90.21,15.9 v86,15.9 84.51,15.9 84.48,15.93 82.97,15.93 62.25,36.65 v52,36.65
EPD_DC  (via drill 0.3, 0.35)
  Top 0.152: v7.5,47.15 7.5,47.4 12,47.4 12.5,46.9 12.5,45.9 U2.5 | v113.5,11.9 109,16.4 TP_EPD_DC.TP 107.7,15.05 107.25,15.05 107.2,15.05 v105.6,13.45 | v85.15,12.3 J1.11
  Bottom 0.152: v113.5,11.9 108.75,7.15 95.75,7.15 93.28,9.62 45.03,9.62 v7.5,47.15 | v85.15,12.3 85.33,12.47 104.62,12.47 v105.6,13.45
EPD_RST  (via drill 0.3)
  Top 0.152: v106.25,20.9 106.5,21.15 107.5,21.15 TP_EPD_RST.TP | J1.10 85.75,13.9 85.75,14.62 v87.75,16.62 | v32.25,46.9 16.75,62.4 16.75,63.15 U2.21
  Bottom 0.152: v32.25,46.9 32.7,46.9 45.55,59.75 46.95,59.75 77.68,29.02 77.88,29.02 90.4,16.5 | 90.4,16.5 90.65,16.25 93.09,16.25 94.97,18.13 95.76,18.13 96.9,17 102.35,17 v106.25,20.9 | 90.4,16.5 87.87,16.5 v87.75,16.62
FLASH_CS  (via drill 0.3)
  Top 0.152: v35.5,62.15 34.75,62.15 U3.1 34.5,62.15 34.5,61.65 34,61.65 33.75,61.4 33.75,60.65 v33.5,60.4 | v7.75,98.15 7.75,98.9 D7.2 | v24.5,81.4 v26,79.9 v26.01,79.9 | v21.2,47.35 21.2,46.16 U2.12 | v46.75,60.65 45.28,62.12 v45.25,62.12 | v77.85,29.45 78.12,29.19 R9.1
  Bottom 0.152: v24.5,81.4 v7.75,98.15 | v33.5,60.4 23.41,50.31 23.41,49.92 21.2,47.71 v21.2,47.35 | v45.25,62.12 45.22,62.15 v35.5,62.15 25.86,71.79 25.86,79.75 v26.01,79.9 | v46.75,60.65 77.85,29.55 v77.85,29.45
GDR
  Top 0.3: Q3.1 66.55,17.7 66.55,17.23 66.56,17.22 R4.2 77.35,13.7 79.56,11.49 87.88,11.49 89.58,13.19 89.58,13.68 J1.2
GND  (via drill 0.3, 0.35)
  Top 0.152: U2.29_5 13.5,53.15 13.5,54.15 U2.29_6 | 161.75,51.4 163,50.15 163,49.4 166,49.4 J2.MP1 | 161.75,51.4 161.75,51.15 J2.A1 | 161.75,51.4 J2.B12 | 80.75,21.4 80.75,21.9 EPD_C8.2 | 80.75,21.4 81.25,21.4 81.5,21.65 81.5,22.65 83.25,22.65 83.25,21.4 84.5,21.4 84.5,21.65 84.75,21.9 v84.75,22.9 | v89.5,21.9 88.75,21.9 EPD_C1.2 | v114.5,43.9 114.5,42.4 115.75,42.4 116,42.65 116,43.15 115.25,43.15 C1_BAT1.2 | v121,42.9 121.75,42.15 IC4.2 | 80.75,21.4 80.25,21.4 80,21.65 80,22.65 77.75,22.65 76.5,23.9 76,23.9 74.5,25.4 73,25.4 73,24.9 72.75,24.65 72.75,21.9 70,19.15 v70,14.65 | v68,12.65 66.75,12.65 R4.1 | J1.8 86.7,13.7 86.7,13.36 87.05,13.01 v87.05,12.02 | v90.35,10.35 91.15,11.15 J1.MP1
  Bottom 0.152: v84.75,22.9 88.5,22.9 v89.5,21.9 | v114.5,43.9 120,43.9 v121,42.9 | v68,12.65 v70,14.65 | v90.35,10.35 88.68,12.02 v87.05,12.02
  pour Bottom: 74.96,9.31 74.98,9.33 93.67,9.33 93.69,9.31 93.71,9.29 93.73,9.27 93.73,0.48 169.97,0.48 169.97,67.07 91.98,67.07 91.96,67.09 91.94,67.11 91.92,67.13 91.92,111.17 67.88,111.17 67.88,110.58 67.86,110.56 67.84,110.54 67.82,110.52 20.23,110.52 20.21,110.54 20.19,110.56 20.17,110.58 20.17,111.12 0.28,111.12 0.28,63.73 6.57,63.73 6.59,63.71 6.61,63.69 6.63,63.67 6.63,45.33 6.61,45.31 6.59,45.29 6.57,45.27 0.58,45.27 0.58,0.63 74.92,0.63 74.92,9.27 74.94,9.29
  pour Top: 93.71,9.29 93.73,9.27 93.73,0.48 169.97,0.48 169.97,67.07 91.98,67.07 91.96,67.09 91.94,67.11 91.92,67.13 91.92,111.17 67.88,111.17 67.88,110.58 67.86,110.56 67.84,110.54 67.82,110.52 20.23,110.52 20.21,110.54 20.19,110.56 20.17,110.58 20.17,111.12 0.28,111.12 0.28,63.73 6.57,63.73 6.59,63.71 6.61,63.69 6.63,63.67 6.63,45.33 6.61,45.31 6.59,45.29 6.57,45.27 0.58,45.27 0.58,0.63 74.92,0.63 74.92,9.27 74.94,9.29 74.96,9.31 74.98,9.33 93.67,9.33 93.69,9.31
GPIO8  (via drill 0.3)
  Top 0.152: v18.25,40.4 R5.1 | v18.5,44.4 19,44.9 19,45.65 U2.10
  Bottom 0.152: v18.25,40.4 18.25,44.15 v18.5,44.4
I2C_PW  (via drill 0.35)
  Top 0.3: R2_PINH.2 159.5,8.7 R1_PINH.2 C2.1 157.3,8.75 C1.1 157.25,9.17 157.55,9.47 156.69,9.47 156.52,9.63 156.52,10.83 156.5,10.85 156.5,11.24 SENSOR2.8 157.92,12.12 157.92,11.81 158.12,11.61 158.78,11.61 158.98,11.81 158.98,12.12 SENSOR2.6 159.25,14.2 158.72,14.72 158.72,15.04 SENSOR2.2 158.18,15.58 158.18,15.89 157.98,16.09 157.66,16.09 134.81,38.95 130.8,38.95 129.59,37.75 126.81,37.75 125.6,38.95 102.55,38.95 102.35,39.15 99.9,39.15 93.6,45.45 85.75,45.45 v85.75,45.4 | U2.17 22.15,63.79 22.15,64.45 22.73,65.03 23.17,65.03 23.5,64.7 v41.15,64.7 | v43.9,64.75 63.32,64.75 v82.62,45.45
  Bottom 0.3: v85.75,45.4 83.05,45.4 83,45.45 v82.62,45.45 | v43.9,64.75 41.2,64.75 v41.15,64.7
INT_RTC  (via drill 0.3)
  Top 0.152: 88.25,63.9 88,63.9 88,63.4 | 88.25,63.9 89.25,63.9 R1_PINH1.1 | 88,63.4 88,61.9 U4.3 | v17,46.9 16.75,46.65 16.75,45.9 U2.8 | 88,63.4 v87.75,63.4 | 88.25,63.9 88.25,68.15 89.25,69.15 TP_INT_RTC.TP
  Bottom 0.152: v17,46.9 31.3,46.9 41.62,57.22 42.23,57.22 48.76,63.75 87.4,63.75 v87.75,63.4
IO/BOOT  (via drill 0.3)
  Top 0.152: v25,63.9 24.5,63.4 24.25,63.4 U2.15 | v44.75,108.9 44.75,109.15 44,109.15 R_BOOT.1 46.51,109.2 47.59,110.28 47.64,110.28 | BOOT_BUTTON.3 51.14,110.23 | BOOT_BUTTON.4 47.64,110.28 | 47.64,110.28 51.09,110.28 51.14,110.23 | C6.1 52.38,109 51.14,110.23
  Bottom 0.152: v25,63.9 25.3,64.2 25.3,89.45 v44.75,108.9
IO/CHANGE  (via drill 0.3)
  Top 0.152: v53,103.9 53,101.15 v52.75,101.15 52,101.15 C8.1 | v59.5,109.65 59.75,109.4 59.75,108.99 R_CHANGE.1 60.16,108.7 60.66,109.2 61.34,109.2 62.07,109.93 62.11,109.98 | v26.5,77.4 14,64.9 14,63.4 U2.23 | CHANGE_BUTTON.3 66.16,110.01 62.15,110.01 62.11,109.98 | CHANGE_BUTTON.4 62.11,109.98
  Bottom 0.152: v53,103.9 53.75,103.9 v59.5,109.65 | v26.5,77.4 29,77.4 v52.75,101.15
MISO  (via drill 0.3)
  Top 0.152: v36.25,59.15 35.75,59.65 35.75,59.9 34.75,60.9 U3.2 34.5,60.9 34,60.4 34,60.15 33.25,59.4 28.75,59.4 v25,63.15 | v42.05,57.65 45,54.7 v45,49.4 45.5,48.9 45.5,48.4 TP_MISO.TP | v47.75,43.15 47.75,42.15 D10.2 | 7.25,94.15 7,93.9 6,93.9 J4.P7 | 7.25,94.15 11.25,98.15 11.25,98.65 R6.1 | 7.25,94.15 v7,94.15 | v8.93,64.4 8.91,64.38 U2.27
  Bottom 0.152: v36.25,59.15 40.55,59.15 v42.05,57.65 | v47.75,43.15 47.75,46.65 v45,49.4 | 8.78,64.4 v8.93,64.4 | 8.78,64.4 10.03,63.15 v25,63.15 | v7,94.15 8.78,92.37 8.78,64.4
MOSI  (via drill 0.3, 0.35)
  Top 0.152: 40.25,56.15 41.25,56.15 41.25,58.15 41.5,58.4 42.25,58.4 U3.5 | 40.25,56.15 38.25,56.15 R7.1 | 40.25,56.15 40.25,52.4 | D9.2 50.5,42.4 50,42.4 v49.75,42.65 49.3,42.65 45.85,46.1 44.65,46.1 40.25,50.49 40.25,52.4 | 40.25,52.4 v40,52.4 | U2.7 15.5,45.9 15.5,46.65 v15.75,46.9 v12.25,50.4 | v7,89.65 6,89.65 J4.P3 | TP_MOSI.TP 105.75,3.65 94.63,14.77 v94.63,14.9 | v95.16,17.67 95.03,17.55 85.62,17.55 83.65,15.58 J1.14
  Bottom 0.152: v15.75,46.9 16.25,46.9 16.75,46.4 34,46.4 v40,52.4 | v49.75,42.65 56.75,42.65 83,16.4 87.36,16.4 87.57,16.19 90.31,16.19 90.53,15.97 93.21,15.97 93.32,16.09 93.35,16.09 | v95.16,17.67 94.94,17.67 93.35,16.09 | 93.35,16.09 93.25,15.99 93.55,15.99 v94.63,14.9 | v12.25,50.4 12.25,59.35 7,64.61 v7,89.65
P_NET_1  (via drill 0.3)
  Top 0.152: v150.25,49.9 149.25,49.9 R2-USB1.2 | J2.A5 161.5,53.15 160.75,53.15 v160.25,52.65
  Bottom 0.152: v150.25,49.9 152.25,47.9 155.5,47.9 v160.25,52.65
P_NET_2  (via drill 0.3)
  Top 0.152: D2.1 v117,41.4 116,41.4 115.75,41.65 115.25,41.65 C1_BAT1.1 | 122.75,42.15 122.75,42.4 122,43.15 IC4.1 | 122.75,42.15 122.75,41.9 122.5,41.65 122.5,41.4 122,41.4 IC4.3 | v133,46.4 133,45.9 133.75,45.9 Q1.2 | 122.75,42.15 v123.75,43.15
  Bottom 0.152: v133,46.4 131.95,45.35 125.95,45.35 v123.75,43.15 122,41.4 v117,41.4
P_NET_3
  Top 0.152: J1.24 78.65,14.65 75.4,17.9 71.75,17.9 71.25,18.4 70.75,18.4 EPD_C12.1
P_NET_5
  Top 0.152: J1.22 79.75,13.9 79.75,18.9 78,20.65 77.5,20.65 EPD_C10.1
P_NET_7
  Top 0.152: J1.20 80.75,13.9 80.75,20.65 EPD_C8.1
P_NET_8
  Top 0.152: J1.19 81.25,13.9 81.25,19.4 82.25,20.4 82.25,20.65 EPD_C7.1
P_NET_9
  Top 0.152: J1.18 81.75,13.9 81.75,18.15 83.75,20.15 83.75,20.65 EPD_C6.1
P_NET_10
  Top 0.152: EPD_C2.1 87.25,20.65 89.72,18.18 95.3,18.18 95.61,17.86 95.61,17.49 93.5,15.37 88.72,15.37 88.25,14.9 88.25,13.85 J1.5
P_NET_11
  Top 0.152: J1.4 88.75,13.85 88.75,14.77 89.07,15.09 93.61,15.09 94.41,15.89 94.52,15.89 95.89,17.27 95.89,17.98 95.41,18.46 89.86,18.46 88.57,19.75 EPD_C1.1
P_NET_12  (via drill 0.3)
  Top 0.152: v50,103.4 49.25,103.4 IC1.5 | v68,106.9 68.25,107.15 68.75,107.15 C_DELAY.1
  Bottom 0.152: v50,103.4 64.5,103.4 v68,106.9
P_NET_13  (via drill 0.3)
  Top 0.152: v92.5,55.9 92.5,55.15 R_CAPACITOR.1 | v91.5,64.9 91.25,65.15 91.25,65.65 D12.1
  Bottom 0.152: v92.5,55.9 92.5,63.9 v91.5,64.9
P_NET_14
  Top 0.152: R2_BAT.2 129.75,53.9 128.64,53.9 125.25,50.51 125.25,49.9 125,49.65 MCP73831.5
P_NET_15  (via drill 0.3)
  Top 0.152: v117.5,53.15 117.5,53.9 R1_BAT.2 | v126.75,48.9 127.25,49.4 127.25,49.65 127.5,49.9 MCP73831.1
  Bottom 0.152: v117.5,53.15 122.5,53.15 v126.75,48.9
P_NET_16
  Top 0.152: CHG_LED.C 121.25,54.4 118.25,54.4 118.25,54.65 118,54.9 116.25,54.9 116.25,54.15 R1_BAT.1
P_NET_17
  Top 0.152: C4.1 100,35.15 99.5,35.15 98.25,33.9 97.5,33.9 D4.1 97.5,34.15 95.32,36.33 88.5,36.33 88.43,36.4 86.19,36.4 D3.2
P_NET_18
  Top 0.152: R2-USB.1 155.88,51.28 160.75,56.15 161.5,56.15 J2.B5
PREVGH  (via drill 0.35)
  Top 0.152: EPD_C9.1 79.25,20.9 79.5,20.65 79.5,20.15 80.25,19.4 80.25,13.9 J1.21 v80.15,12.6 | D5.1 94,29.6 96.6,27 96.6,14.1 v97.32,13.38
  Bottom 0.152: v97.32,13.38 97.17,13.38 96.57,12.77 80.33,12.77 v80.15,12.6
PREVGL  (via drill 0.35)
  Top 0.152: EPD_C11.1 73.5,18.4 75.3,18.4 79.15,14.54 J1.23 v79.15,12.65 | D4.2 92.05,36.05 85.28,36.05 84.52,36.81 84.52,37.78 84.64,37.9 101.29,37.9 102.2,36.99 102.2,14.45 v97.85,14.45
  Bottom 0.152: v79.15,12.65 79.15,13.05 96.35,13.05 97.13,13.83 97.23,13.83 v97.85,14.45
RESE  (via drill 0.3)
  Top 0.152: v73.5,16.15 73,15.65 73,15.15 R3.2 | Q3.2 67.5,18.65 v67,19.15 | J1.3 89.25,13.85 v89.25,14.66
  Bottom 0.152: v67,19.15 70.5,19.15 v73.5,16.15 75,14.65 89,14.65 89.01,14.66 v89.25,14.66
RESE'  (via drill 0.3)
  Top 0.152: R2.2 61.75,11.9 62.5,11.15 | 62.5,11.15 63.75,9.9 63.75,9.15 64,8.9 SJ1.2 | v70.75,15.15 71.5,15.15 R3.1 | 62.5,11.15 v62.75,11.4
  Bottom 0.152: v70.75,15.15 66.5,15.15 v62.75,11.4
RESET  (via drill 0.3)
  Top 0.152: 28.39,108.74 28.25,108.65 v27.5,108.65 27.43,108.65 26.88,109.2 26.86,109.2 RESET_BUTTON.3 RESET_BUTTON.4 | 28.39,108.74 C5.1 | v46.25,104.15 46.25,103.4 IC1.1 | v10.25,46.9 10.25,45.9 U2.3 | 28.39,108.74 29.05,108.07 29.05,107.01 29,106.96 29,106.9 28.95,106.9 28.93,106.89 27.87,106.89 27.11,107.65 20.54,107.65 19.49,108.7 R_RESET.1
  Bottom 0.152: v27.5,108.65 28.25,109.4 45,109.4 46.25,108.15 v46.25,104.15 25.58,83.48 25.58,62.98 10.25,47.65 v10.25,46.9
RTC_RST  (via drill 0.35)
  Top 0.152: U4.4 86.64,66.73 v86.65,66.75 | v29.3,69.15 25.85,69.15 v22.95,66.25 | v22.95,64.5 22.95,63.32 U2.16
  Bottom 0.152: v86.65,66.75 86.25,66.35 32.1,66.35 v29.3,69.15 | v22.95,66.25 v22.95,64.5
RX
  Top 0.152: U2.24 12.75,63.4 12.75,65.4 15,67.65 15,68.9 TP_RX.TP
SCK  (via drill 0.3)
  Top 0.152: 44.5,59.65 50,59.65 TP_SCK.TP | 44.5,59.65 42.5,59.65 U3.6 | v74.5,23.4 74,23.9 D8.2 | J1.13 84.25,13.9 84.25,14.95 84.13,15.07 v84.13,15.45 | v49,36.4 48.25,36.4 R8.1 | v14.5,46.9 14.25,46.65 14.25,46.15 14,45.9 U2.6 | v4.75,91.4 4.75,91.65 5.75,91.65 J4.P5 | v44.5,55.9 44.5,59.65
  Bottom 0.152: v14.5,46.9 15,46.9 15.5,46.4 15.97,45.93 | 43,45.9 49,39.9 v49,36.4 51.5,36.4 64.5,23.4 v74.5,23.4 82.5,15.4 83.6,15.4 83.65,15.45 v84.13,15.45 | v4.75,91.4 4.5,91.15 4.5,66.65 9.45,61.7 9.45,46.95 10.47,45.93 15.97,45.93 | v44.5,55.9 44.5,47.4 43,45.9 | 43,45.9 42.95,45.9 42.92,45.93 15.97,45.93
SCL  (via drill 0.3)
  Top 0.152: R2_PINH.1 160.75,10.15 160.75,11.65 161,11.9 v161,13.65 160,14.65 160,15.15 SENSOR2.4 | v134.75,53.9 134,53.9 U1.7 | v22,58.4 18,62.4 18,63.15 U2.20 | v89.75,54.4 90.5,53.65 90.5,52.65 U4.16 | J3.4 164.85,21.57 v164.85,22.2
  Bottom 0.152: v161,13.65 161,14.9 166,19.9 166,21.05 v164.85,22.2 163.95,22.2 134.75,51.4 v134.75,53.9 134.75,54.9 134.25,55.4 89.75,55.4 | v22,58.4 29,58.4 32.25,61.65 45.75,61.65 48.13,64.03 87.87,64.03 89.75,62.15 89.75,55.4 | v89.75,54.4 89.75,55.4
SDA  (via drill 0.3)
  Top 0.152: v134,54.9 134,54.4 U1.8 | v159.5,10.9 159.5,10.15 R1_PINH.1 | v159.25,16.4 SENSOR2.3 | v88.75,54.15 89.25,53.65 89.25,52.65 U4.15 | U2.19 19.25,63.15 19.25,62.85 20.3,61.8 23.98,61.8 v35.49,50.3 | J3.3 164.25,20.1 v164.2,20.15
  Bottom 0.152: 134,53.9 134,50.35 v164.2,20.15 159.85,15.8 | 134,53.9 v134,54.9 | v159.5,10.9 159.5,14.15 160.5,15.15 159.85,15.8 | 159.85,15.8 v159.25,16.4 | 134,53.9 89,53.9 v88.75,54.15 81.75,61.15 46.55,61.15 42.34,56.94 42.29,56.94 35.65,50.3 v35.49,50.3
SRC
  Top 0.3: D5.2 100.15,33.15 C4.2 | Q3.3 68.03,18.97 68.03,17.41 67.86,17.25 67.14,17.25 66.97,17.41 66.97,18.44 66.56,18.85 65.83,18.85 65.67,18.69 65.67,12.11 66.06,11.72 70.43,11.72 70.64,11.93 77.97,11.93 78.83,11.06 88.4,11.06 92.08,14.74 93.76,14.74 94.56,15.54 94.67,15.54 96.25,17.12 96.25,26.85 92.9,30.2 92.9,31.35 96.65,31.35 D5.2 | L1.1 92.4,34.34 96.23,30.5 D5.2
SS_SD  (via drill 0.3)
  Top 0.152: R11.1 45.65,36.15 v45.65,36.85 | v46.5,41.65 46,42.15 D11.2 | v11.5,46.9 11.5,45.9 U2.4 | v28.3,45.35 23.48,50.17 v22.98,50.17 v17.5,55.65 | v8.25,85.65 8.25,86.4 6.5,88.15 J4.P2
  Bottom 0.152: 45.65,40.8 v45.65,36.85 | v46.5,41.65 45.65,40.8 | 45.65,40.8 45.5,40.65 45.5,42.95 42.8,45.65 28.6,45.65 v28.3,45.35 | v11.5,46.9 13.75,46.9 14.25,47.4 20.5,47.4 22.98,49.88 v22.98,50.17 | v8.25,85.65 8.5,85.4 8.5,63.5 16.35,55.65 v17.5,55.65
TX
  Top 0.152: U2.25 11.25,63.4 11.25,67.9 10.5,68.65 10.5,68.9 TP_TX.TP
USB_D+  (via drill 0.3)
  Top 0.152: v151,50.15 D1.1 | v37.75,63.7 36.25,62.2 v36.25,59.9 | v23.75,47.4 24,47.15 24,45.9 U2.14
  Bottom 0.152: v23.75,47.4 v36.25,59.9 | v37.75,63.7 40.12,66.07 135.08,66.07 v151,50.15
USB_D-  (via drill 0.3)
  Top 0.152: v151,48.4 152,48.4 D1.3 | v24.5,43.4 23,44.9 23,45.65 U2.13 | v143.17,40.57 v144.75,42.15
  Bottom 0.152: v144.75,42.15 v151,48.4 | v24.5,43.4 58,9.9 93.5,9.9 95.75,7.65 108.5,7.65 141.42,40.57 v143.17,40.57
VBAT
  Top 0.152: U1.3 132,53.4 132,53.9 U1.2
  Top 0.3: U1.2 131.89,53.91 131.5,53.91 130.55,54.86 TP_VBAT.TP | U1.3 131.89,53.23 131.5,53.23 131.32,53.05 131.32,52.93 130.04,51.65 MCP73831.3 127.15,51.25 126.83,51.25 126.67,51.09 126.67,49.57 C2_BAT.1 132.45,48.15 Q1.3
VBUS
  Top 0.3: TP_VBUS.TP 124.75,51.85 MCP73831.4 124.95,52.05 CHG_LED.A 118.5,49.9 C1_BAT.1 117.9,49.2 D2.2 121.16,43.5 121.39,43.73 131.42,43.73 R1.2 132.35,45.2 Q1.1 132.51,45.7 133.24,44.97 134.26,44.97 134.79,45.5 C5_USB.1 | C5_USB.1 C4_USB.1 153.25,48.28 153.8,48.83 154.14,48.83 D1.5 | PFMF.050.1.2 154.65,43.6 153.25,45 C5_USB.1
VRTC
  Top 0.3: U4.14 88.6,51.87 88.6,51.47 89.35,50.72 C11.1 89.97,51.27 90.81,51.27 91.02,51.47 91.02,52.17 R_CAPACITOR.2 92.8,53.95 C10_SUPERCAP.2
VUSB
  Top 0.152: 161.75,51.9 161.75,52.15 J2.B9 | 161.75,51.9 J2.A4 | 161.75,51.9 162.8,52.7 162.8,55.73 161.53,57 J2.A9 161.75,56.9 161.75,56.65 J2.B4
  Top 0.3: PFMF.050.1.1 151.71,42.55 153.78,40.47 155.51,40.47 155.68,40.63 155.68,44.46 155.37,44.77 154.09,44.77 153.92,44.93 153.92,47.27 154.09,47.43 155.05,47.43 159.45,51.83 161.56,51.83 J2.A4